# Altium PCB PCB_【征集令】迷你加热台控制板1.6mm_2022-02-26.pcbdoc
Units mm, origin at the board's own origin, x right, y up, seen from the top; angles counter-clockwise.
Board outline 101.48 x 117.21 mm, 2 copper layers (Top Layer, Bottom Layer); 49 components, 65 nets, 198 pads, 91 vias.
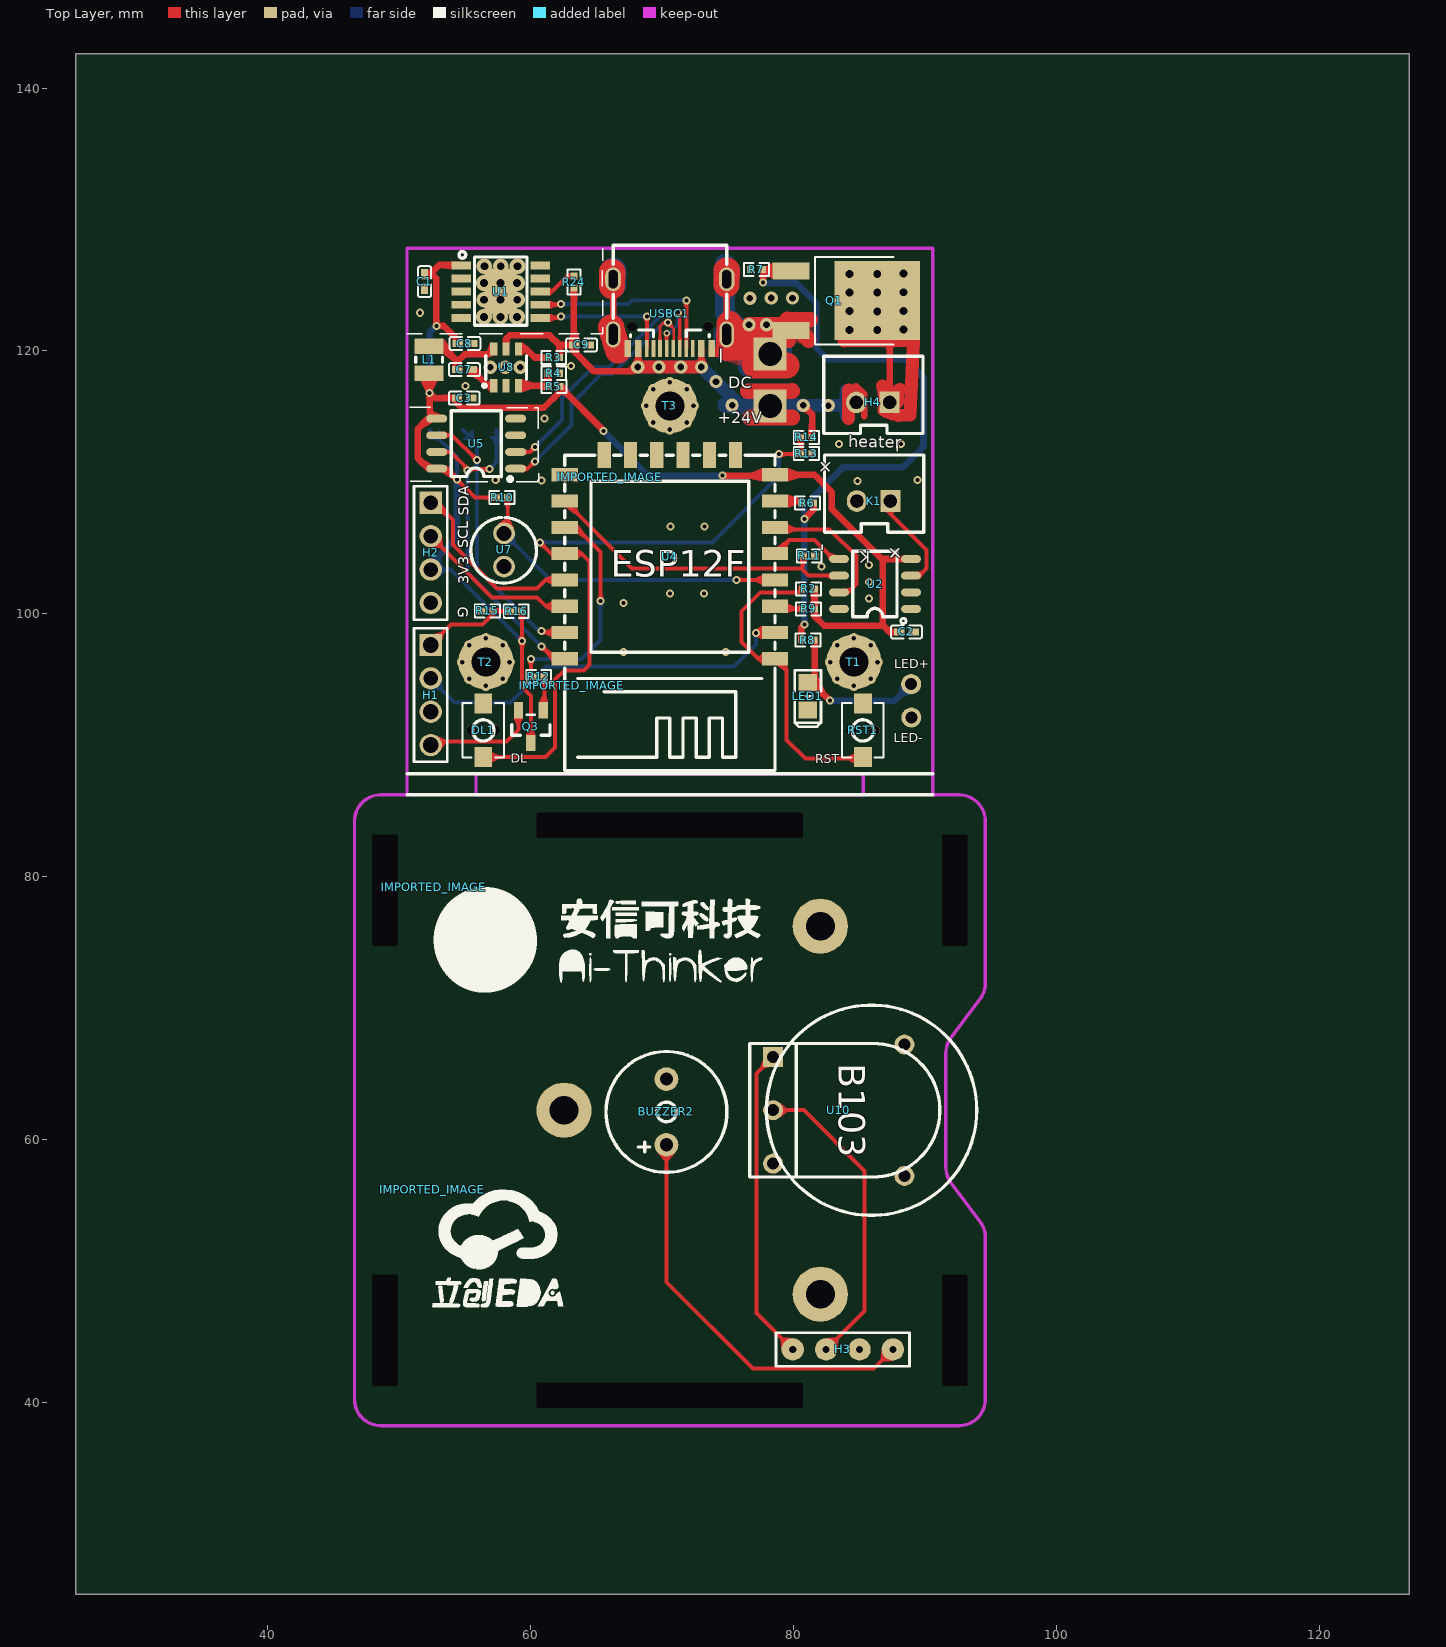
[diagram p0: Top Layer view]
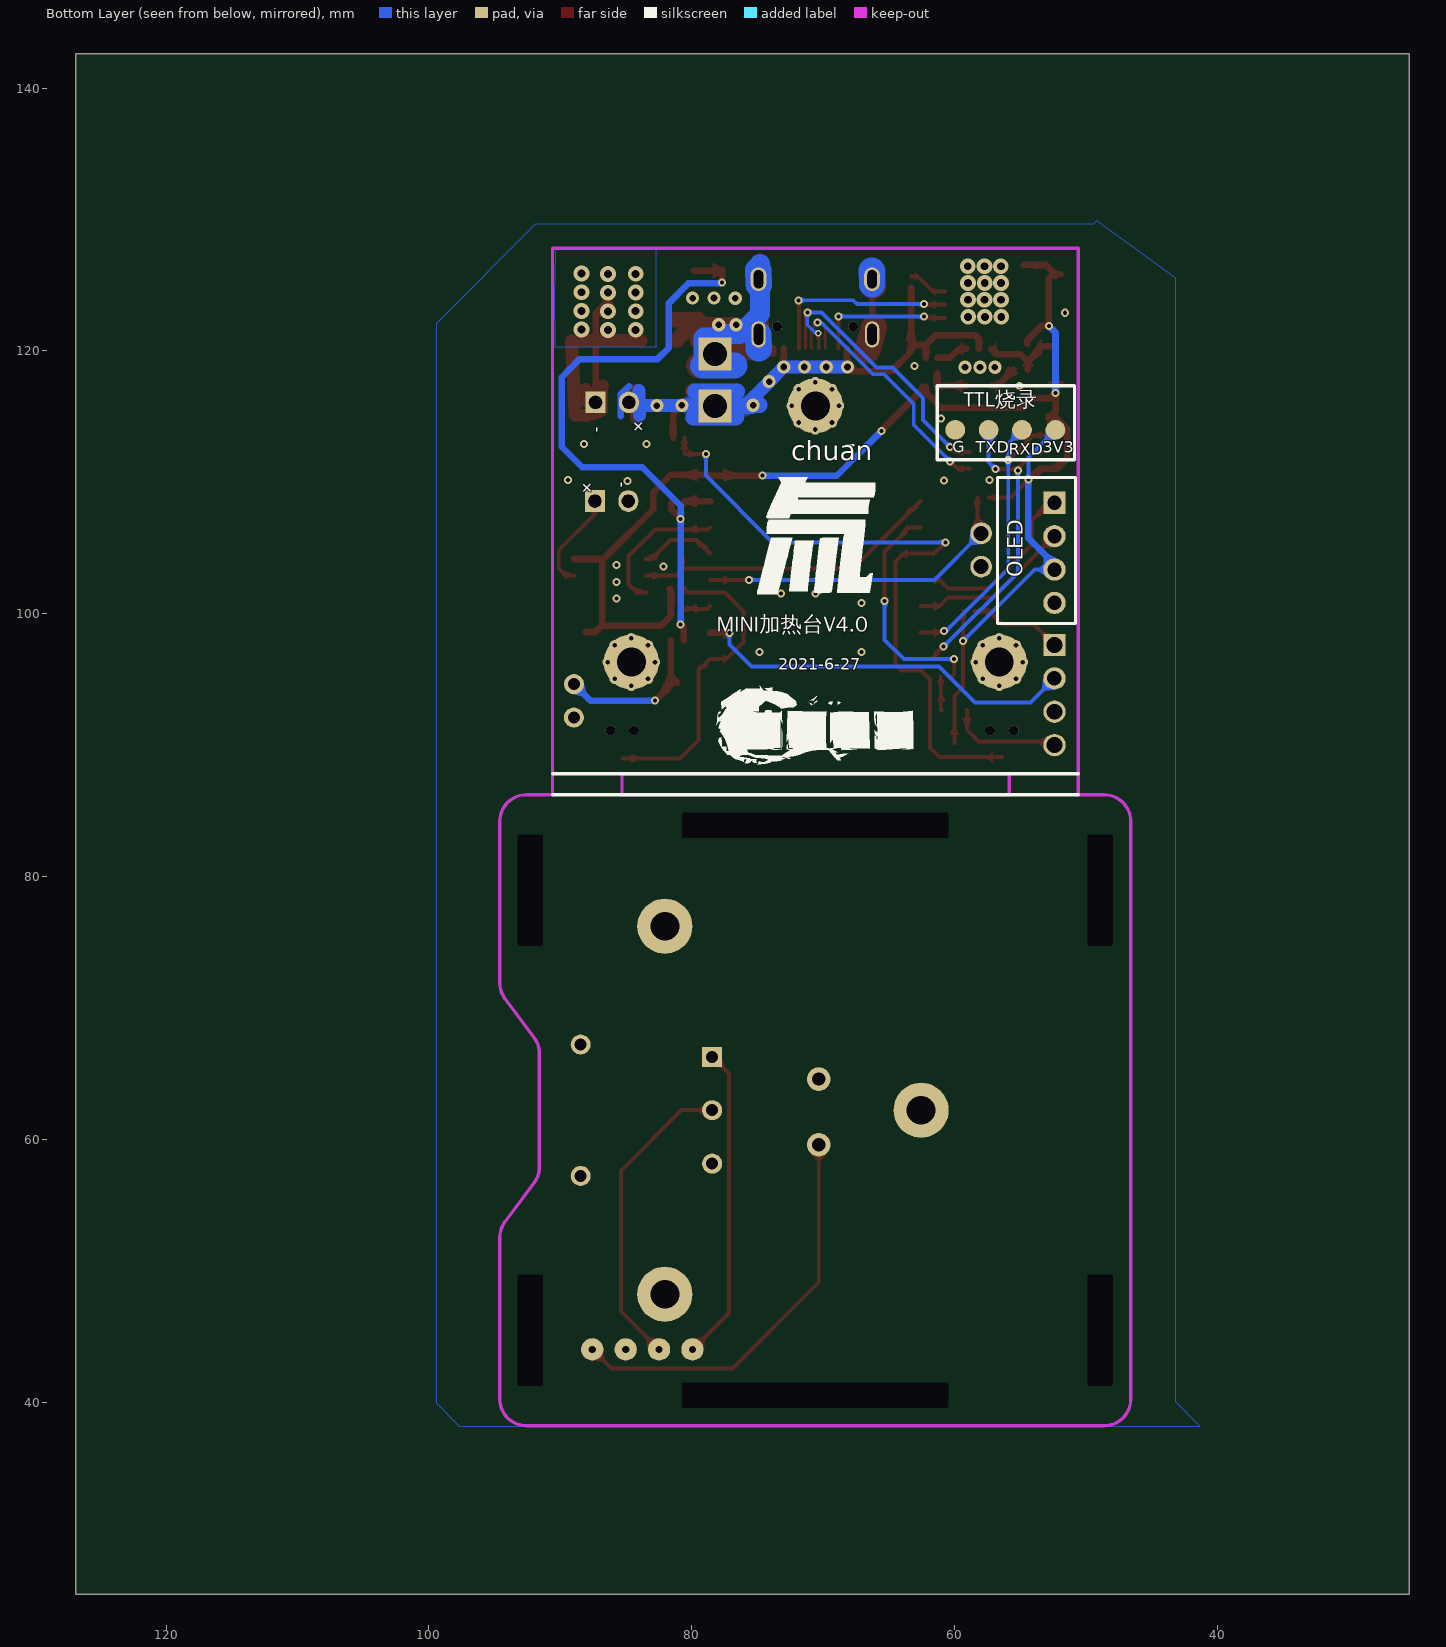
[diagram p1: Bottom Layer view, seen from below]

## Layer stack, top to bottom
Top Layer: signal copper (thickness not stored)
Dielectric: dielectric 0.32, FR-4, Dk 4.8
Bottom Layer: signal copper (thickness not stored)

## Board outline
126.875,25.4 25.4,25.4 25.4,142.613 126.875,142.613
cut-out: 80.604,39.6 60.604,39.6 cw(c60.604,39.727) 60.477,39.727 60.477,41.377 cw(c60.604,41.377) 60.604,41.504 80.604,41.504 cw(c80.604,41.377) 80.731,41.377 80.731,39.727 cw(c80.604,39.727) 80.604,39.6
cut-out: 93.105,74.75 91.455,74.75 cw(c91.455,74.877) 91.328,74.877 91.328,83.077 cw(c91.455,83.077) 91.455,83.204 93.105,83.204 cw(c93.105,83.077) 93.232,83.077 93.232,74.877 cw(c93.105,74.877) 93.105,74.75
cut-out: 49.754,74.75 48.104,74.75 cw(c48.104,74.877) 47.977,74.877 47.977,83.077 cw(c48.104,83.077) 48.104,83.204 49.754,83.204 cw(c49.754,83.077) 49.881,83.077 49.881,74.877 cw(c49.754,74.877) 49.754,74.75
cut-out: 49.754,41.25 48.104,41.25 cw(c48.104,41.377) 47.977,41.377 47.977,49.577 cw(c48.104,49.577) 48.104,49.704 49.754,49.704 cw(c49.754,49.577) 49.881,49.577 49.881,41.377 cw(c49.754,41.377) 49.754,41.25
cut-out: 80.604,82.95 60.604,82.95 cw(c60.604,83.077) 60.477,83.077 60.477,84.727 cw(c60.604,84.727) 60.604,84.854 80.604,84.854 cw(c80.604,84.727) 80.731,84.727 80.731,83.077 cw(c80.604,83.077) 80.604,82.95
cut-out: 93.105,41.25 91.455,41.25 cw(c91.455,41.377) 91.328,41.377 91.328,49.577 cw(c91.455,49.577) 91.455,49.704 93.105,49.704 cw(c93.105,49.577) 93.232,49.577 93.232,41.377 cw(c93.105,41.377) 93.105,41.25

## Components (designator, comment, footprint, x,y, rotation, side; value= is the part's Value field where it differs from the comment)
BUZZER2 "HNB09A03" BUZ-TH_BD9.0-P5.00-D0.6-FD 70.345,62.098 r90 top
C1 "1uf" C0402 51.945,125.278 r90 top
C2 "100nF" C0402 88.605,98.618 r0 top
C3 "100nF" C0402 54.955,116.408 r0 top
C7 "100nF" C0402 54.975,118.578 r180 top
C8 "10uF" C0402 55.015,120.568 r180 top
C9 "4.7uf 25V" C0402 63.885,120.468 r180 top
DL1 "TS-1088-AC02016" SW-SMD_L4.0-W2.9-LS5.0-A 56.405,91.129 r270 top
H1 "Lee_2.54排针-P2.54-4P" LEE_2.54排针-P2.54-4P#1 52.406,93.818 r270 top
H2 "Lee_2.54排针-P2.54-4P" LEE_2.54排针-P2.54-4P#2 52.405,104.638 r270 top
H3 "Lee_2.54排针-P2.54-4P" LEE_2.54排针-P2.54-4P#3 83.764,44.028 r0 top
H4 "K" XH2.54-2 84.786,116.087 r180 top
IMPORTED_IMAGE "IMPORTED_IMAGE" IMPORTED_IMAGE 66.041,110.384 r0 top
IMPORTED_IMAGE "IMPORTED_IMAGE" IMPORTED_IMAGE 63.153,94.533 r0 top
IMPORTED_IMAGE "IMPORTED_IMAGE" IMPORTED_IMAGE 52.539,56.16 r0 top
IMPORTED_IMAGE "IMPORTED_IMAGE" IMPORTED_IMAGE 52.645,79.184 r0 top
K1 "K" XH2.54-2 84.835,108.578 r180 top
L1 "4.7uH" IND-SMD_L2.5-W2.0 52.284,119.328 r90 top
LED1 "19-217/GHC-YR1S2/3T" LED0805_RED 81.105,93.718 r270 top
Q1 "AOD4184A" TO-252-2_L6.6-W6.1-P4.57-LS9.9-TL-CW 83.106,123.827 r0 top
Q3 "SS8550" SOT-23-3_L2.9-W1.3-P1.90-LS2.4-BR 60.025,91.418 r90 top
R2 "10K" R0402 81.165,101.888 r180 top
R3 "100K" R0402 61.765,119.488 r180 top
R4 "5.1K" R0402 61.775,118.308 r180 top
R5 "16K" R0402 61.785,117.288 r0 top
R6 "100R" R0402 81.066,108.429 r0 top
R7 "100K" R0402 77.185,126.188 r0 top
R8 "470" R0402 81.114,97.997 r0 top
R9 "10K" R0402 81.165,100.377 r180 top
R10 "10K" R0402 57.835,108.838 r0 top
R11 "10K" R0402 81.205,104.408 r180 top
R12 "1K" R0402 60.625,95.218 r0 top
R13 "360K" R0402 80.995,112.198 r180 top
R14 "2M" R0402 80.995,113.418 r0 top
R15 "1K" R0402 56.725,100.228 r0 top
R16 "2.2K" R0402 58.915,100.198 r0 top
R24 "10K" R0402 63.305,125.238 r270 top
RST1 "TS-1088-AC02016" SW-SMD_L4.0-W2.9-LS5.0-A 85.295,91.129 r90 top
T1 "M2.6" 螺钉孔M2.6 84.605,96.328 r0 top
T2 "M2.6" 螺钉孔M2.6 56.605,96.328 r0 top
T3 "M2.6" 螺钉孔M2.6 70.605,115.828 r0 top
U1 "CH224K" ESSOP10-EP 57.735,124.518 r0 top
U2 "MAX6675" SOIC-8_L5.0-W4.0-P1.27-LS6.0-BL 86.215,102.268 r90 top
U4 "ESP-12F(ESP8266MOD)" WIFIM-SMD_ESP-12F-ESP8266MOD 70.605,104.328 r90 top
U5 "CH330N" SOP-8_L4.9-W3.9-P1.27-LS6.0-BL 55.865,112.948 r90 top
U7 "SW-520D" SW-520D 57.985,106.128 r90 top
U8 "JW5026" SOT-23-6_L2.9-W1.6-P0.95-LS2.8-BL 58.145,118.758 r0 top
U10 "B103单联" B103单联拨盘电位器 78.454,62.227 r270 top
USBC1 "type-c16P" USB-C-SMD_TYPE-C-USB-17 70.605,122.828 r180 top

## Footprints (in the part's own frame and the unit in brackets; to place one, negate y for a bottom-side part, rotate by r counter-clockwise, add the part's x,y. Pads: shape width x height; smd on the part's side, far side on the other; paste and mask are expansions set on the pad)
B103单联拨盘电位器 [mil]
  rect 60x60 hole 36: 1(-160.01,0)
  round 60 hole 36: 2(-0.01,0) 3(159.99,0) ""(-196.81,393.7) ""(196.89,393.7)
  silkscreen extent -315,-70 315,610
BUZ-TH_BD9.0-P5.00-D0.6-FD [mm]
  round 1.8 hole 1: 1(-2.5,0) 2(2.5,0)
  silkscreen extent -4.6,-4.6 4.6,4.6
C0402 [mm]
  rect 0.79x0.54 smd: 1(-0.545,0) 2(0.545,0)
  silkscreen extent -1.17,-0.5 1.17,0.5
ESSOP10-EP [mm]
  rect 2.5x3.5 smd: 0(0,0)
  rect 1.5x0.6 smd: 1(-3,2) 2(-3,1) 3(-3,0) 4(-3,-1) 5(-3,-2) 6(3,-2) 7(3,-1) 8(3,0) 9(3,1) 10(3,2)
  silkscreen extent -3.17,-2.57 2,3.05
IMPORTED_IMAGE [mm]
IND-SMD_L2.5-W2.0 [mm]
  rect 1.2x2.2 smd: 1(1.028,0) 2(-1.028,0)
  silkscreen extent -0.2,-1.02 0.2,1.02
LED0805_RED [mm]
  rect 1.3x1.4 smd: 1(-1.05,0) 2(1.05,0)
  silkscreen extent -2,-1 2.3,1
LEE_2.54排针-P2.54-4P#1 [mm]
  rect 1.7x1.7 hole 1.2: 1(-3.81,0)
  round 1.7 hole 1.1: 2(-1.27,0)
  round 1.7 hole 1.2: 3(1.27,0) 4(3.81,0)
  silkscreen extent -5.08,-1.27 5.08,1.27
LEE_2.54排针-P2.54-4P#2 [mm]
  rect 1.7x1.7 hole 1.1: 1(-3.81,0)
  round 1.7 hole 1.1: 2(-1.27,0) 3(1.27,0) 4(3.81,0)
  silkscreen extent -5.08,-1.27 5.08,1.27
LEE_2.54排针-P2.54-4P#3 [mm]
  round 1.7 hole 0.55: 1(-3.81,0) 2(-1.27,0) 3(1.27,0) 4(3.81,0)
  silkscreen extent -5.08,-1.27 5.08,1.27
R0402 [mm]
  rect 0.566x0.54 smd: 1(-0.433,0) 2(0.433,0)
  silkscreen extent -0.94,-0.5 0.94,0.5
SOIC-8_L5.0-W4.0-P1.27-LS6.0-BL [mm]
  oval 0.6x1.52 smd: 1(-1.905,-2.74) 2(-0.635,-2.74) 3(0.635,-2.74) 4(1.905,-2.74) 5(1.905,2.74) 6(0.635,2.74) 7(-0.635,2.74) 8(-1.905,2.74)
  silkscreen extent -2.49,-1.67 2.5,1.7
SOP-8_L4.9-W3.9-P1.27-LS6.0-BL [mm]
  oval 0.6x1.6 smd: 1(-1.905,-3) 2(-0.635,-3) 3(0.635,-3) 4(1.905,-3) 5(1.905,3) 6(0.635,3) 7(-0.635,3) 8(-1.905,3)
  silkscreen extent -2.84,-2.74 2.5,1.9
SOT-23-3_L2.9-W1.3-P1.90-LS2.4-BR [mm]
  rect 1.25x0.7 smd: 1(1.25,-0.95) 2(1.25,0.95) 3(-1.25,0)
  silkscreen extent -0.65,-1.46 0.9,1.46
SOT-23-6_L2.9-W1.6-P0.95-LS2.8-BL [mm]
  rect 0.55x1 smd: 1(-0.95,-1.4) 2(0,-1.4) 3(0.95,-1.4) 4(0.95,1.4) 5(0,1.4) 6(-0.95,1.4)
  silkscreen extent -1.78,-1.52 1.55,0.9
SW-520D [mil]
  round 65 hole 45: 1(-100,0) 2(0,0)
  silkscreen extent -149,-97 47,99
SW-SMD_L4.0-W2.9-LS5.0-A [mm]
  rect 1.53x1.36 smd: 1(-2.035,0) 2(2.035,0)
  round 0.75 hole 0.75 unplated: ""(0,0.9) ""(0,-0.9)
  silkscreen extent -2.08,-1.58 2.08,1.58
TO-252-2_L6.6-W6.1-P4.57-LS9.9-TL-CW [mm]
  rect 2.8x1.3 smd: 1(-3.292,2.273) 3(-3.292,-2.273)
  rect 6.5x6 smd: 2(3.292,0)
  silkscreen extent -1.46,-3.35 4.51,3.34
USB-C-SMD_TYPE-C-USB-17 [mm]
  oval 1.2x1.8 hole 0.7 slot 1.4 at 90 deg: 0(-4.32,-2.634) 0(4.32,-2.634)
  oval 1.1x2 hole 0.7 slot 1.6 at 90 deg: 0(-4.32,1.566) 0(4.32,1.566)
  rect 0.5x1.3 smd: A1(-3.2,2.633) A4(-2.4,2.633) A9(2.4,2.633) A12(3.2,2.633)
  rect 0.28x1.3 smd: A5(-1.25,2.633) A6(-0.25,2.633) A7(0.25,2.633) A8(1.25,2.634) B5(1.75,2.633) B6(0.75,2.633) B7(-0.75,2.633) B8(-1.75,2.634)
  round 0.75 hole 0.75 unplated: ""(-2.89,0.956) ""(2.89,0.956)
  silkscreen extent -4.32,-5.22 4.32,1.75
WIFIM-SMD_ESP-12F-ESP8266MOD [mm]
  rect 1x2 smd: 1(-7.751,-8.002) 2(-5.751,-8.002) 3(-3.751,-8.002) 4(-1.751,-8.002) 5(0.249,-8.002) 6(2.249,-8.002) 7(4.249,-8.002) 8(6.249,-8.001) 9(6.249,7.999) 10(4.249,8) 11(2.249,8.002) 12(0.249,8.001) 13(-1.751,8) 14(-3.751,8.001) 15(-5.751,8) 16(-7.751,8.001)
  rect 2x1 smd: 17(7.75,-5) 18(7.749,-3.002) 19(7.749,-1.003) 20(7.749,0.998) 21(7.749,2.997) 22(7.75,4.997)
  silkscreen extent -16.25,-8 7.75,8
XH2.54-2 [mil]
  rect 60x65 hole 39.36: 1(-100.1,0)
  oval 60x65 hole 39.36: 2(0,0)
  silkscreen extent -200,-138 97,93
螺钉孔M2.6 [mm]
  round 0.8 hole 0.35: 1(-1.8,0) 1(-1.273,1.273) 1(-1.273,-1.273) 1(0,-1.8) 1(0,1.8) 1(1.273,1.273) 1(1.273,-1.273) 1(1.8,0)
  round 4.2 hole 2.2: 1(0,0)

## Free pads (board coordinates)
  round 4.2 hole 2.2: 1(62.553,62.228) 1(82.053,76.228) 1(82.054,48.228)
  rect 2.5x2.5 hole 1.8: 1(78.235,115.808) 2(78.235,119.768)
  round 1.524 hole 0.914: 3(88.965,94.648) 4(88.975,92.108)
  round 1.5 smd far side: 5(52.336,113.998) 5(54.876,113.998) 5(57.416,113.998) 5(59.956,113.998)

## Via types
v1: diameter 0.61, hole 0.305, Top Layer to Bottom Layer, tented both sides, 50 vias
v2: diameter 1.2, hole 0.6, Top Layer to Bottom Layer, tented both sides, 24 vias
v3: diameter 1, hole 0.5, Top Layer to Bottom Layer, tented both sides, 16 vias
v4: diameter 0.5, hole 0.254, Top Layer to Bottom Layer, tented both sides, 1 vias

## Nets (pads, with @x,y where several pads share a name; then routed paths per layer and width w, separated by ;. In a path a pad name is that pad's centre, name@x,y a point inside that pad or via, vN(x,y) a via of type N, cw(c..) or ccw(c..) an arc to the next point about the centre after c; other vN are vias at no path point)
3V3: C1.2 C2.1 C3.1 C8.2 H2.3 L1.2 pad.5@52.336,113.998 Q3.3 R2.1 R5.2 R9.1 R10.1 R16.2 U1.1 U2.4 U4.8 U5.5 U5.8 | length 121.8
  Top Layer w0.3: v1@54.395,110.207 55.764,108.837 R10.1 ; R16.2 59.348,97.926 v1(59.355,97.918) 59.356,94.428 60.024,93.757 Q3.3@60.024,90.168
  Top Layer w0.5: L1.2@52.284,118.299 52.284,116.859 v1@52.325,116.818 ; U5.8@52.863,111.042 53.559,111.042 v1@54.395,110.207 ; U5.8@52.866,111.042 52.218,111.042 51.433,111.827 51.433,114.077 52.211,114.852 52.866,114.852 52.325,115.393 v1@52.325,116.818 ; C8.2@54.469,120.567 54.469,120.842 53.404,121.908 v1(52.835,121.908) 52.835,125.528 52.538,125.822 51.944,125.822 52.327,125.822 53.054,126.549 54.705,126.549 U1.1 ; v1@65.563,113.907 65.563,113.94 R5.2 62.218,116.882 61.014,115.678 54.773,115.678 54.41,116.043 54.41,116.407 52.734,116.407 v1@52.325,116.818 ; v1@74.606,110.506 78.606,110.506 U4.8 ; U4.8@78.606,110.575 81.606,110.575 82.937,109.244 82.937,107.956 86.719,104.171 U2.4@88.954,104.171 ; R2.1@81.664,101.888 81.598,101.819 R9.1 81.598,99.843 82.355,99.086 86.854,99.086 87.324,98.617 88.06,98.617 87.357,98.617 86.805,99.168 86.805,104.171
  Bottom Layer w0.3: pad.5@52.335,113.998 54.395,111.938 v1(54.395,110.208) ; H2.3 53.905,103.368 v1(59.355,97.918)
  Bottom Layer w0.5: v1(52.325,116.818) 52.325,121.398 v1(52.835,121.908) ; H2.3@52.394,103.768 54.396,105.767 v1@54.396,110.207 ; v1(65.565,113.908) 68.965,110.508 v1(74.605,110.508)
ADC: H1.2 U4.2 | length 29.7
  Top Layer w0.5: v1(77.145,98.548) 78.578,98.548 U4.2@78.606,98.576
  Bottom Layer w0.3: H1.2 54.226,93.267 58.465,93.267 61.185,95.988 75.475,95.988 77.147,97.656 v1@77.147,98.548
BEEP: R12.1 U4.11 | length 17.5
  Top Layer w0.3: v1@60.034,96.546 60.034,95.375 R12.1@60.191,95.218 ; U4.11 63.455,106.577 65.335,104.697 v1@65.335,100.969
  Bottom Layer w0.3: v1@60.035,96.546 63.865,96.546 65.336,98.017 v1(65.335,100.968)
  other v1: 60.035,96.548
C7_1: C7.1 U8.1 | length 2.2
  Top Layer w0.5: C7.1 56.742,117.357 U8.1@57.197,117.357
CC1: U1.7 USBC1.A5 | length 15
  Top Layer w0.3: U1.7@60.735,123.519 62.284,123.519 v1@62.325,123.557 ; USBC1.A5@71.855,120.194 71.855,123.839 v1@71.875,123.856
  Bottom Layer w0.3: v1(62.325,123.558) 67.435,123.558 67.735,123.858 v1(71.875,123.858)
CC2: U1.6 USBC1.B5 | length 10.6
  Top Layer w0.3: U1.6@60.735,122.518 62.236,122.518 v1@62.335,122.617 ; USBC1.B5@68.855,120.194 v1@68.855,122.627
  Bottom Layer w0.3: v1(62.335,122.617) 63.828,122.617 63.838,122.628 v1(68.855,122.628)
CS: R11.2 U2.6 U4.10 | length 24.1
  Top Layer w0.3: U4.10@62.604,108.576 67.722,103.46 80.605,103.46 ; R11.2@80.704,104.408 80.704,103.361 81.164,102.901 U2.6@83.475,102.901
DM: U5.2 USBC1.A7 USBC1.B7 | length 23.7
  Top Layer w0.254: USBC1.A7@70.354,120.194 70.354,121.337 v4@70.374,121.357 ; v1@71.205,122.927 71.355,122.777 USBC1.B7@71.355,120.194
  Top Layer w0.3: U5.2@58.865,112.312 59.96,112.312 v1@60.354,112.708
  Bottom Layer w0.254: v4(70.375,121.358) 70.576,121.358 71.206,121.987 v1@71.206,122.927
  Bottom Layer w0.3: v1(60.355,112.708) 62.404,114.758 62.404,116.407 64.736,118.738 65.955,118.738 70.144,122.927 v1@71.206,122.927
  other v1: 71.205,122.928
DP: U5.1 USBC1.A6 USBC1.B6 | length 21.6
  Top Layer w0.2: USBC1.B6@69.853,120.194 69.853,121.878 70.123,122.147 70.445,122.147 70.905,121.687 USBC1.A6@70.905,120.194
  Top Layer w0.3: U5.1@58.865,111.042 59.79,111.042 v1@60.354,111.609
  Bottom Layer w0.3: v1(60.355,111.608) 63.116,114.367 63.116,115.967 65.376,118.228 66.214,118.228 70.134,122.147 v1@70.446,122.147
  other v1: 70.445,122.148
GND: BUZZER2.2 C1.1 C2.2 C3.2 C8.1 C9.1 DL1.1 H1.3 H2.4 H3.3 K1.2 LED1.2 pad.1@62.553,62.228 pad.1@82.053,76.228 pad.1@82.054,48.228 pad.2 pad.4 pad.5@59.956,113.998 Q1.3 R4.1 R7.1 R11.1 R13.1 R15.1 RST1.2 T1.1 T2.1 T3.1 U1.0 U2.1 U2.2 U4.9 U5.3 U7.1 U8.2 U10.3 USBC1.0 USBC1.A1 USBC1.A12 | length 63.8
  Top Layer w0.5: USBC1.0@66.285,125.462 66.285,121.261 67.352,120.194 USBC1.A12@67.405,120.194 ; USBC1.A1@73.803,120.194 73.803,119.808 74.923,119.808 74.923,121.261 USBC1.0@74.923,125.462
  Top Layer w1: USBC1.0@74.923,121.261 74.951,121.289 77.895,121.289 79.645,120.707 Q1.3@79.813,121.555 ; v3(76.625,121.997) 77.335,121.288 77.895,121.288
  Top Layer w1.2: v3(76.625,121.997) 80.006,121.997 81.164,120.836 ; pad.2@77.745,120.227 79.074,121.555 Q1.3@79.813,121.555 ; 79.545,122.388 81.285,122.378
  Top Layer w1.5: USBC1.0@74.926,121.261 76.402,121.261 pad.2@78.294,119.368
  Top Layer w1.6: USBC1.0@74.926,121.261 74.926,120.427 74.916,120.029 77.585,120.067 77.745,120.227 78.294,119.678 pad.2@78.294,119.368
  Top Layer w2: USBC1.0@66.135,121.786 66.656,120.057 ; USBC1.0@66.195,124.945 USBC1.0@66.215,126.01 ; USBC1.0@74.916,125.052 USBC1.0@74.935,126.117 ; USBC1.0@75.125,120.975 USBC1.0@75.145,122.04 ; pad.2@77.075,118.898 pad.2@79.455,118.898
  Bottom Layer w1: 77.895,121.289 79.152,121.289 79.384,121.057 79.384,119.368 pad.2@78.294,119.368
  Bottom Layer w1.5: 74.805,126.628 74.805,122.828 76.345,121.288 77.895,121.288
  Bottom Layer w2: USBC1.0@66.285,125.065 USBC1.0@66.305,126.13 ; 74.906,120.196 USBC1.0@74.926,121.261 ; USBC1.0@74.916,125.052 USBC1.0@74.935,126.118 ; 76.755,118.888 pad.2@79.135,118.888
  other v1: 67.079,97.077 74.856,97.077 67.075,100.808 85.745,101.148 70.605,101.528 73.205,101.528 85.745,102.428 82.155,103.588 85.745,103.707 70.645,106.638 73.245,106.638 84.895,110.118 60.825,110.128 57.355,110.188 89.435,110.178 83.465,112.938 88.205,112.938 61.055,114.868 55.055,117.347 63.065,118.868 51.595,122.908
  other v2: 56.455,122.598 57.705,122.598 58.975,122.598 56.475,123.898 57.725,123.898 58.995,123.898 56.465,125.168 57.715,125.168 58.985,125.168 56.485,126.448 57.735,126.448 59.005,126.448
  other v3: 56.935,118.757 58.075,118.757 59.215,118.757 77.955,121.997 76.695,124.008 78.315,124.027 79.935,124.018
GPIO0: DL1.2 R13.2 R14.1 U4.12 | length 51.1
  Top Layer w0.3: DL1.2@56.404,89.092 61.149,89.092 61.875,89.818 61.875,94.997 62.574,95.698 64.065,95.698 64.494,96.127 64.494,103.978 63.895,104.578 U4.12 61.576,104.578 v1@60.715,105.436 ; v1@78.924,112.157 80.521,112.157 80.562,112.198 R14.1@80.562,113.417
  Bottom Layer w0.3: v1@60.715,105.436 73.855,105.436 78.925,110.509 v1(78.925,112.158)
  other v1: 60.715,105.438
GPIO13: R6.1 U4.7 | length 2.1
  Top Layer w0.5: U4.7@78.606,108.576 80.565,108.576 R6.1@80.565,108.429
H1_1: H1.1 R15.2 R16.1 | length 7.3
  Top Layer w0.3: H1.1@52.404,97.628 53.956,99.178 56.364,99.178 57.159,99.97 57.159,100.227 57.186,100.199 R16.1@58.482,100.199
H1_4: H1.4 Q3.2 | length 8.6
  Top Layer w0.3: H1.4@52.404,90.008 52.686,90.288 58.185,90.288 59.074,91.177 Q3.2@59.074,92.668
H3_1: H3.1 U10.1 | length 23.9
  Top Layer w0.3: U10.1@78.454,66.292 77.184,65.022 77.184,46.795 H3.1@79.952,44.027
H3_2: H3.2 U10.2 | length 23.7
  Top Layer w0.3: U10.2@78.454,62.228 80.796,62.228 85.406,57.618 85.406,46.938 H3.2@82.495,44.027
H3_4: BUZZER2.1 H3.4 | length 31
  Top Layer w0.3: BUZZER2.1@70.344,59.597 70.344,49.137 76.915,42.569 86.115,42.569 H3.4@87.573,44.027
IO16: R10.2 U4.4 U7.2 | length 24.9
  Top Layer w0.3: U7.2@57.984,106.14 57.984,106.366 58.269,106.651 R10.2 ; v1@75.665,102.587 75.675,102.576 U4.4@78.606,102.576
  Bottom Layer w0.3: U7.2@57.985,106.127 61.526,102.587 v1@75.666,102.587
  other v1: 75.665,102.588
L1_1: C7.2 L1.1 U8.6 | length 7
  Top Layer w0.5: L1.1 53.326,120.356 54.431,119.251 C7.2 54.431,119.173 55.005,119.747 56.785,119.747 U8.6
LED1_1: LED1.1 pad.3 R8.2 | length 12.4
  Top Layer w0.5: R8.2@81.614,97.997 81.614,95.276 LED1.1 81.423,94.768 v1@82.805,93.387
  Bottom Layer w0.5: v1(82.805,93.388) 87.705,93.388 pad.3
MISO: U2.7 U4.6 | length 10.8
  Top Layer w0.3: U4.6@78.606,106.577 78.756,106.427 82.764,106.427 84.804,104.387 84.804,102.277 84.159,101.631 U2.7@83.475,101.631
Q1_1: Q1.1 R6.2 R7.2 R8.1 | length 48.4
  Top Layer w0.5: v1@77.705,125.218 77.705,126.168 77.684,126.188 77.771,126.102 Q1.1@79.853,126.102 ; R8.1@80.615,97.997 80.615,98.937 v1@80.854,99.178 ; v1@80.844,107.227 81.565,107.948 R6.2@81.565,108.429
  Bottom Layer w0.5: v1(77.705,125.217) 77.784,125.137 80.266,125.137 81.747,123.658 81.747,120.237 82.605,119.378 88.536,119.378 89.905,118.007 89.905,112.719 88.335,111.146 87.985,111.146 83.773,111.146 80.845,108.218 v1@80.845,107.227 ; v1(80.845,107.228) 80.845,99.188 v1(80.855,99.178)
Q1_2: H4.1 Q1.2 | length 26
  Top Layer w0.5: Q1.2@86.394,123.808 87.326,122.876 H4.1@87.326,116.087 ; 86.905,115.187 87.505,114.969
  Top Layer w0.8: 86.785,117.321 86.785,115.441 H4.1@87.905,116.117
  Top Layer w1: 83.875,120.778 88.445,120.808 ; 86.785,117.321 87.326,116.087 87.905,116.117 87.905,116.866 88.093,117.057 ; 87.965,115.098 88.015,115.098 88.875,115.128 89.145,120.738
  other v2: 86.385,121.597 84.275,121.607 88.395,121.627 86.385,123.017 84.275,123.027 88.395,123.047 84.275,124.447 86.385,124.437 88.395,124.467 84.275,125.867 86.385,125.857 88.395,125.887
R3_2: R3.2 U8.4 | length 2.5
  Top Layer w0.5: U8.4 59.663,120.158 60.334,119.488 R3.2@61.332,119.488
R4_2: R4.2 R5.1 U8.3 | length 3.3
  Top Layer w0.5: U8.3@59.097,117.357 60.948,117.357 60.948,117.288 61.352,117.288 61.342,117.298 R4.2@61.342,118.307
R12_2: Q3.1 R12.2 | length 2.6
  Top Layer w0.3: Q3.1@60.974,92.668 61.057,92.668 R12.2@61.057,95.218
R24_1: R24.1 U1.8 | length 3
  Top Layer w0.3: U1.8@60.735,124.517 61.634,124.517 62.787,125.67 R24.1@63.305,125.67
RXD: pad.5@57.416,113.998 U4.16 U5.7 | length 25.8
  Top Layer w0.3: U5.7@52.863,112.312 53.92,112.312 55.195,111.037 v1(55.195,110.917) 55.285,111.008 v1(56.885,111.008) ; v1@60.844,97.507 61.776,96.577 U4.16
  Bottom Layer w0.3: v1@55.196,110.918 55.196,103.155 v1@60.845,97.507 ; v1(56.885,111.008) 57.415,111.538 pad.5@57.415,113.997
  other v1: 60.845,97.508
S$7: 
S$50: 
S$52: 
S$438: 
S$3262: 
S$20504: 
S$20506: 
S$20508: 
S$20510: 
S$20512: 
S$20514: 
S$20516: 
S$20520: 
S$20522: 
S$24043: 
S$26919: 
S$26978: 
S$26980: 
S$26982: 
S$29675: 
S$29677: 
S$29679: 
S$29681: 
S$29683: 
S$35757: 
S$35779: 
S$35781: 
S$36377: 
S$36379: 
SCL: H2.2 U4.14 | length 12.4
  Top Layer w0.3: H2.2@52.404,105.906 57.062,101.248 60.494,101.248 61.164,100.577 U4.14
SCLK: U2.5 U4.5 | length 5.9
  Top Layer w0.3: U4.5@78.606,104.578 79.655,105.627 81.616,105.627 83.069,104.171 U2.5@83.475,104.171
SDA: H2.1 U4.13 | length 14.4
  Top Layer w0.3: H2.1@52.393,108.848 54.105,107.136 54.105,105.276 57.453,101.929 60.494,101.929 61.144,102.576 U4.13@62.604,102.576
TXD: pad.5@54.876,113.998 U4.15 U5.6 | length 23.6
  Top Layer w0.3: U5.6@52.863,113.582 54.029,113.582 v1@55.924,111.687 ; v1@60.824,98.688 60.936,98.576 U4.15@62.604,98.576
  Bottom Layer w0.3: pad.5@54.875,113.997 55.925,112.948 55.925,111.688 55.925,103.408 60.645,98.688 v1(60.825,98.688)
  other v1: 55.925,111.688
U2_3: K1.1 U2.3 | length 7.7
  Top Layer w0.3: K1.1@87.377,108.578 87.377,107.606 90.125,104.857 90.125,103.437 89.589,102.901 U2.3@88.954,102.901
U4_1: R2.2 RST1.1 U4.1 | length 23.6
  Top Layer w0.3: R2.2@80.664,101.888 80.405,101.626 77.484,101.626 76.054,100.196 76.054,97.87 77.346,96.577 78.606,96.577 79.495,95.688 79.495,90.407 80.91,88.992 RST1.1@85.294,88.992
U4_3: R9.2 U4.3 | length 2.2
  Top Layer w0.3: U4.3@78.606,100.577 78.807,100.377 R9.2
VBUS: C9.2 H4.2 pad.1@78.235,115.808 R3.1 R14.2 R24.2 U8.5 USBC1.A4 USBC1.A9 | length 76.9
  Top Layer w0.5: U8.5 58.147,120.918 58.416,121.187 61.454,121.187 62.198,120.445 R3.1 ; 62.198,120.394 62.198,120.468 C9.2@63.338,120.468 ; R24.2@63.305,124.804 63.305,120.468 C9.2@63.338,120.468 ; USBC1.A9@68.205,120.194 68.205,118.827 68.154,118.776 67.824,118.446 64.837,118.446 63.338,119.942 C9.2@63.338,120.468 ; v3@73.006,118.776 USBC1.A4@73.006,120.194 ; v3(80.755,115.858) 81.428,115.185 R14.2@81.428,113.417 ; 84.745,117.329 85.403,116.737 85.393,115.027
  Top Layer w1: v3(68.155,118.778) v3(69.771,118.778) v3(71.435,118.778) v3(73.005,118.778) ; 84.193,114.855 84.218,117.02
  Top Layer w1.2: 76.545,116.928 79.906,116.948 ; 76.675,114.928 79.904,114.935
  Bottom Layer w0.5: 84.745,117.329 85.403,116.737 ; 85.396,115.038 85.396,116.747
  Bottom Layer w1: v3(68.155,118.778) v3(73.005,118.778) v3(74.117,117.666) ; v3(74.117,117.666) 75.224,116.559 75.975,115.807 78.235,115.807 78.215,115.828 76.605,115.828 ; v3(75.335,115.868) 80.745,115.868 v3(80.755,115.858) 82.635,115.858 v3(82.655,115.837) 84.535,115.838 84.784,116.087 84.606,115.909 H4.2@84.606,115.828 ; 83.994,115.099 84.015,116.968
  Bottom Layer w1.2: 74.824,115.889 75.314,115.889 75.335,115.868 75.396,115.807 pad.1@78.235,115.807 ; 76.545,116.928 79.774,116.935 ; 76.645,114.928 79.874,114.935
pads on no net: DL1. RST1. U1.2 U1.3 U1.4 U1.5 U1.9 U1.10 U2.8 U4.17 U4.18 U4.19 U4.20 U4.21 U4.22 U5.4 U10. USBC1. USBC1.A8 USBC1.B8

## Polygon pours and split planes (outlines as drawn)
GND on Bottom Layer (solid): 49.205,129.898 49.465,129.638 91.915,129.638 99.465,122.088 99.465,39.968 97.685,38.188 41.335,38.188 43.185,40.038 43.185,125.538
Q1_2 on Bottom Layer (solid): 82.695,127.718 90.355,127.698 90.375,127.558 90.465,124.078 90.435,120.528 90.425,120.318 82.715,120.318 82.695,120.298
VBUS on Bottom Layer (solid): 71.255,119.278 71.305,119.228 74.005,119.228 75.655,117.578 84.855,117.578 85.555,116.878 85.605,116.878 85.655,116.828 85.655,114.928 85.055,114.328 74.505,114.328 73.955,114.878 73.955,116.478 72.105,118.328 71.005,118.328 70.905,118.428 70.905,119.128
GND on Top Layer (solid): 49.36,129.913 49.62,129.653 92.07,129.653 99.62,122.103 99.62,39.983 97.84,38.203 41.49,38.203 43.34,40.053 43.34,125.553
VBUS on Top Layer (solid): 71.255,119.278 71.305,119.228 74.005,119.228 75.655,117.578 84.855,117.578 85.555,116.878 85.605,116.878 85.655,116.828 85.655,114.928 85.055,114.328 74.505,114.328 73.955,114.878 73.955,116.478 72.105,118.328 71.005,118.328 70.905,118.428 70.905,119.128
Q1_2 on Top Layer (solid): 87.855,114.588 86.395,115.168 86.385,117.038 85.555,118.098 84.875,118.888 84.315,119.538 84.045,119.858 83.715,120.218 83.155,120.828 84.738,120.828 89.595,120.798 89.575,114.628 87.855,114.588

## Keep-outs
Keep-Out Layer:
  lines w0.254: 46.604,40.227 ccw(c48.604,40.227) 48.605,38.227 ; 91.605,57.894 ccw(c93.605,57.894) 92.005,56.694 ; 91.605,66.56 cw(c93.605,66.561) 92.005,67.761 ; 92.605,38.227 ccw(c92.605,40.227) 94.605,40.227 ; 92.605,86.227 cw(c92.605,84.227) 94.605,84.227 ; 94.205,53.761 cw(c92.605,52.561) 94.605,52.561 ; 94.205,70.694 ccw(c92.605,71.894) 94.605,71.894
  lines w0.254 net S$26980: 46.605,84.227 cw(c48.605,84.227) 48.605,86.227

## Other copper
Top Layer:
  region net DP: 59.366,111.343 59.365,110.743 59.79,110.892 59.79,111.192
  region net DM: 59.366,112.613 59.365,112.013 59.815,112.162 59.816,112.462
  region net 3V3: 52.214,110.784 52.54,111.343 51.888,111.726 51.575,111.332
  region net 3V3: 53.416,111.338 53.314,110.743 53.933,110.315 54.194,110.761
  region net RXD: 53.366,112.613 53.365,112.013 53.815,112.162 53.816,112.462
  region net TXD: 53.366,113.883 53.365,113.283 53.815,113.432 53.816,113.732
  region net 3V3: 52.083,114.75 53.19,115.153 52.678,115.393 52.148,115.216
  region net 3V3: 52.521,114.553 52.227,115.119 51.569,114.566 51.875,114.164
  region net U2_3: 89.561,102.64 89.27,103.165 89.733,103.257 89.884,102.985
  region net 3V3: 88.496,103.873 88.495,104.473 87.745,104.422 87.746,103.922
  region net MISO: 84.059,101.359 83.812,101.906 84.279,101.964 84.412,101.672
  region net CS: 83.016,102.603 83.015,103.203 82.565,103.052 82.566,102.752
  region net SCLK: 82.747,104.038 83.359,104.473 82.795,104.659 82.529,104.5
  region net H3_1: 78.219,65.529 77.692,66.064 77.533,65.584 77.744,65.37
  region net R12_2: 60.682,93.292 61.325,93.292 61.207,93.742 60.907,93.742
  region net H1_4: 59.425,92.042 58.725,92.042 58.924,91.592 59.224,91.592
  region net 3V3: 59.675,90.793 60.375,90.793 60.174,91.243 59.874,91.243
  region net 3V3: 87.665,98.888 87.665,98.348 87.357,98.367 87.357,98.867
  region net 3V3: 87.665,98.888 87.665,98.348 87.324,98.367 87.324,98.867
  region net 3V3: 54.015,116.138 54.805,116.138 54.66,116.043 54.16,116.043
  region net 3V3: 54.015,116.678 54.015,116.138 53.265,116.157 53.265,116.657
  region net R12_2: 61.341,94.948 60.775,94.948 60.907,94.498 61.207,94.498
  region net GPIO0: 80.28,111.928 80.28,112.468 79.83,112.307 79.83,112.007
  region net GPIO0: 80.28,112.468 80.845,112.468 80.712,112.918 80.412,112.918
  region net GPIO0: 80.28,113.148 80.845,113.148 80.712,112.698 80.412,112.698
  region net VBUS: 81.145,113.688 81.711,113.688 81.678,114.438 81.178,114.438
  region net H1_1: 57.441,99.958 56.875,99.958 56.482,99.508 56.907,99.508
  region net H1_1: 57.441,100.498 57.441,99.958 57.891,100.049 57.891,100.349
  region net H1_1: 58.2,100.468 58.2,99.928 57.75,100.049 57.75,100.349
  region net 3V3: 59.631,99.928 59.065,99.928 59.198,99.478 59.498,99.478
  region net 3V3: 81.315,101.618 81.88,101.618 81.848,100.868 81.348,100.868
  region net U4_1: 80.832,101.618 80.449,102.158 80.317,101.751 80.511,101.521
  region net 3V3: 81.88,100.647 81.315,100.647 81.348,101.397 81.848,101.397
  region net 3V3: 81.315,100.107 81.88,100.107 81.848,99.843 81.348,99.843
  region net U4_3: 80.449,100.107 80.449,100.647 79.999,100.527 79.999,100.227
  region net 3V3: 57.12,109.108 57.12,108.568 56.67,108.687 56.67,108.987
  region net IO16: 58.551,108.568 57.985,108.568 58.119,108.118 58.419,108.118
  region net CS: 81.055,104.138 80.49,104.138 80.554,103.688 80.854,103.688
  region net 3V3: 52.215,126.218 52.215,125.428 52.538,125.572 52.538,126.072
  region net 3V3: 52.215,126.218 52.215,125.428 52.327,125.572 52.327,126.072
  region net C7_1: 55.915,118.848 55.125,118.308 55.85,117.895 56.27,118.182
  region net L1_1: 54.035,118.848 54.825,118.848 54.681,119.173 54.181,119.173
  region net L1_1: 54.035,118.848 54.825,118.848 54.681,119.251 54.181,119.251
  region net 3V3: 54.075,120.838 54.865,120.838 54.719,120.842 54.219,120.842
  region net VBUS: 62.945,120.198 62.945,120.738 62.198,120.718 62.198,120.218
  region net VBUS: 63.735,120.198 62.945,120.198 63.088,119.942 63.588,119.942
  region net VBUS: 62.945,120.738 63.735,120.738 63.555,121.488 63.055,121.488
  region net R24_1: 63.035,125.953 63.035,125.388 62.787,125.52 62.787,125.82
  region net VBUS: 63.575,124.522 63.035,124.522 63.055,123.772 63.555,123.772
  region net VBUS: 62.481,119.758 61.915,119.758 61.948,120.445 62.448,120.445
  region net R3_2: 61.05,119.218 61.05,119.758 60.334,119.738 60.334,119.238
  region net R4_2: 61.625,118.038 61.06,118.038 61.092,117.298 61.592,117.298
  region net R4_2: 61.07,117.558 61.07,117.018 60.948,117.038 60.948,117.538
  region net R4_2: 61.635,117.558 61.07,117.558 61.092,118.307 61.592,118.307
  region net 3V3: 62.501,117.018 61.935,117.018 61.968,116.882 62.468,116.882
  region net 3V3: 62.501,117.558 61.935,117.018 62.568,116.584 62.93,116.93
  region net SDA: 53.255,108.361 53.255,107.611 53.705,107.324 53.705,107.748
  region net LED1_1: 81.805,95.356 81.637,94.118 82.313,93.525 82.398,94.148
  region net U2_3: 87.752,107.752 87.002,107.752 87.227,107.606 87.527,107.606
  region net CC2: 61.485,122.818 61.485,122.218 61.935,122.368 61.935,122.668
  region net CC1: 61.485,123.818 61.485,123.218 61.935,123.369 61.935,123.669
  region net R24_1: 61.485,124.818 61.485,124.218 61.634,124.367 61.634,124.667
  region net 3V3: 53.985,126.218 53.985,126.818 53.235,126.799 53.235,126.299
  region net DM: 71.215,120.844 71.495,120.844 71.482,121.225 71.228,121.225
  region net DM: 70.215,120.844 70.495,120.844 70.481,121.225 70.227,121.225
  region net DP: 69.715,120.844 69.995,120.844 69.953,121.144 69.753,121.144
  region net ADC: 77.607,98.077 77.607,99.077 77.146,98.798 77.146,98.298
  region net U4_3: 79.607,100.752 79.607,100.077 80.057,100.227 80.057,100.527
  region net IO16: 77.607,102.201 77.607,102.951 77.157,102.726 77.157,102.426
  region net SCLK: 78.73,105.077 79.48,105.077 79.767,105.527 79.343,105.527
  region net MISO: 79.607,106.802 79.607,106.077 80.057,106.277 80.057,106.577
  region net GPIO13: 79.607,109.077 79.607,108.077 80.357,108.326 80.357,108.826
  region net 3V3: 79.606,111.077 79.606,110.077 80.356,110.325 80.356,110.825
  region net 3V3: 77.606,110.077 77.606,111.077 76.856,110.756 76.856,110.256
  region net CS: 63.478,108.077 62.728,108.077 63.342,107.627 63.766,107.627
  region net BEEP: 63.604,106.803 63.604,106.077 64.054,105.766 64.054,106.19
  region net GPIO0: 63.605,104.953 63.605,104.203 63.895,104.428 63.895,104.728
  region net GPIO0: 61.605,104.203 61.605,104.953 61.576,104.728 61.576,104.428
  region net SDA: 61.605,102.201 61.605,102.951 61.155,102.726 61.155,102.426
  region net SCL: 61.605,100.202 61.605,100.952 61.164,100.727 61.164,100.427
  region net TXD: 61.605,98.201 61.605,98.951 61.155,98.726 61.155,98.426
  region net RXD: 61.605,96.373 61.605,97.077 61.155,97.409 61.155,96.985
  region net U4_1: 79.481,96.077 78.731,96.077 79.283,95.688 79.601,95.794
  region net U4_1: 77.607,96.202 77.607,96.952 77.346,96.727 77.346,96.427
  region net R3_2: 59.37,120.658 59.37,119.658 59.663,119.908 59.663,120.408
  region net VBUS: 57.87,120.658 58.42,120.658 58.397,120.918 57.897,120.918
  region net L1_1: 57.193,119.658 56.92,120.658 56.709,120.025 56.962,119.57
  region net C7_1: 56.92,116.858 56.92,117.857 56.742,117.607 56.742,117.107
  region net R4_2: 59.37,117.857 59.37,116.858 60.12,117.107 60.12,117.607
  region net U4_1: 84.615,88.617 84.615,89.367 84.165,89.142 84.165,88.842
  region net Q1_1: 78.414,125.477 78.414,126.727 77.771,126.352 77.771,125.852
  region net 3V3: 52.909,117.7 51.659,117.7 52.034,116.95 52.534,116.95
  region net L1_1: 53.384,120.923 53.384,119.756 54.134,119.194 54.134,119.901
  region net H1_1: 52.723,98.478 53.256,97.951 53.415,98.427 53.202,98.637
  region net GPIO0: 57.085,88.717 57.085,89.467 57.535,89.242 57.535,88.942
  region net BEEP: 60.263,96.345 59.806,96.347 59.884,96.133 60.184,96.132
  region net BEEP: 65.564,101.169 65.106,101.169 65.185,101.382 65.485,101.383
  region net 3V3: 54.699,110.226 54.376,109.903 54.582,109.808 54.794,110.019
  region net 3V3: 54.414,110.512 54.091,110.188 53.925,110.323 54.278,110.678
  region net Q1_1: 77.934,125.42 77.476,125.419 77.455,125.632 77.955,125.633
  region net Q1_1: 81.15,107.209 80.826,107.532 80.962,107.698 81.316,107.345
  region net Q1_1: 80.875,98.873 80.551,99.196 80.438,99.113 80.793,98.76
  region net ADC: 77.347,98.319 77.347,98.776 77.56,98.798 77.56,98.298
  region net IO16: 75.873,102.811 75.861,102.354 76.076,102.426 76.084,102.726
  region net DM: 71.064,122.657 71.491,122.822 71.482,122.589 71.228,122.491
  region net DM: 70.552,121.181 70.178,121.204 70.227,121.026 70.481,121.01
  region net VBUS: 73.38,119.108 72.63,119.108 72.756,119.458 73.256,119.458
  region net VBUS: 68.049,118.289 67.684,118.944 67.421,118.696 67.7,118.196
  region net VBUS: 67.805,119.135 68.553,119.08 68.455,119.438 67.955,119.475
  region net VBUS: 68.486,118.403 68.486,119.153 68.836,119.278 68.836,118.278
  region net RXD: 61.15,97.526 60.825,97.203 61.032,97.108 61.244,97.319
  region net RXD: 54.894,110.961 55.276,111.211 55.096,111.348 54.84,111.18
  region net RXD: 55.442,110.738 55.343,111.184 55.567,111.158 55.634,110.858
  region net TXD: 61.081,98.854 60.958,98.413 61.183,98.426 61.267,98.726
  region net TXD: 55.944,111.992 55.621,111.668 55.525,111.874 55.737,112.087
  region net CC1: 62.146,123.311 62.103,123.766 61.898,123.669 61.926,123.369
  region net CC1: 72.094,123.645 71.637,123.667 71.705,123.45 72.005,123.436
  region net CC2: 62.194,122.347 62.085,122.791 61.895,122.668 61.969,122.368
  region net CC2: 68.627,122.426 69.084,122.426 69.005,122.213 68.705,122.213
  region net DP: 70.244,121.919 70.243,122.376 70.123,122.247 70.123,122.047
  region net DP: 70.75,122.166 70.426,121.843 70.668,121.783 70.809,121.925
  region net DP: 60.374,111.303 60.051,111.627 59.956,111.421 60.167,111.208
  region net DM: 60.374,112.403 60.051,112.727 59.956,112.521 60.168,112.308
  region net 3V3: 74.808,110.736 74.806,110.278 75.02,110.256 75.021,110.756
  region net 3V3: 65.6,114.21 65.26,113.905 65.102,114.049 65.474,114.384
  region net VBUS: 70.102,118.403 70.102,119.153 70.452,119.278 70.452,118.278
  region net VBUS: 69.44,118.402 69.44,119.152 69.09,119.278 69.09,118.278
  region net VBUS: 71.104,118.402 71.104,119.152 70.754,119.278 70.754,118.278
  region net Q1_2: 86.839,123.409 85.939,123.419 86.036,123.812 86.752,123.804
  region net Q1_2: 86.791,123.459 86.772,122.559 87.194,122.654 87.209,123.347
  region net LED1_1: 82.824,93.692 82.501,93.368 82.335,93.503 82.687,93.858
  region net 3V3: 53.037,121.679 53.036,122.137 53.25,122.158 53.251,121.658
  region net 3V3: 53.064,122.109 52.607,122.109 52.585,122.323 53.085,122.322
  region net 3V3: 52.554,116.616 52.097,116.616 52.075,116.403 52.575,116.402
  region net 3V3: 52.63,116.836 52.305,116.513 52.441,116.347 52.795,116.7
  region net 3V3: 52.533,117.041 52.078,116.996 52.034,117.206 52.534,117.255
  region net GPIO0: 79.127,112.386 79.127,111.929 79.34,112.007 79.34,112.307
  region net GPIO0: 61.02,105.456 60.696,105.134 60.902,105.038 61.114,105.25
  region net RXD: 56.684,110.779 56.684,111.236 56.47,111.158 56.47,110.858
  region net 3V3: 59.584,97.716 59.127,97.716 59.206,97.502 59.506,97.503
  region net 3V3: 59.58,98.123 59.123,98.115 59.198,98.33 59.498,98.335
  region net H3_2: 78.958,61.656 78.958,62.799 79.492,62.377 79.492,62.077
  region net H3_4: 71.02,59.002 69.67,59.003 70.194,58.372 70.494,58.372
  region net H3_4: 86.726,44.081 87.627,43.179 86.862,43.103 86.65,43.316
  region net H3_2: 82.441,44.876 83.343,43.974 83.419,44.74 83.206,44.952
  region net H3_1: 79.106,43.973 80.006,44.876 79.241,44.951 79.029,44.738
  region net SCL: 52.35,105.059 53.254,105.959 53.328,105.194 53.116,104.982
  region net IO16: 58.722,106.5 57.524,106.812 58.119,107.254 58.419,107.176
  region net H1_4: 53.106,89.526 52.798,90.763 53.492,90.438 53.567,90.138
  pour cut-out net Q1_2: 84.055,119.528 84.205,119.318 86.285,116.998 86.285,115.118 86.315,115.088 86.365,115.088 86.815,114.768 86.965,114.668 87.915,114.338 85.305,114.278 85.855,114.838 85.865,116.868 85.855,116.878 85.755,116.968 84.815,117.818 84.015,117.818 83.955,117.878
  pour cut-out net SDA: 62.538,95.028 62.638,95.128 78.638,95.128 78.638,87.828 62.538,87.828
Bottom Layer:
  region net BEEP: 60.238,96.776 60.236,96.318 60.45,96.396 60.451,96.696
  region net BEEP: 65.564,100.766 65.107,100.766 65.186,100.553 65.486,100.553
  region net 3V3: 54.624,110.409 54.167,110.409 54.245,110.623 54.545,110.623
  region net 3V3: 54.624,110.006 54.167,110.006 54.146,109.792 54.646,109.793
  region net Q1_1: 77.948,125.403 77.859,124.954 78.063,124.887 78.162,125.387
  region net Q1_1: 80.617,107.026 81.074,107.026 81.095,106.812 80.595,106.812
  region net Q1_1: 81.074,107.43 80.616,107.429 80.595,107.643 81.095,107.643
  region net Q1_1: 81.079,99.385 80.622,99.374 80.595,99.587 81.095,99.599
  region net ADC: 77.375,98.347 76.917,98.345 76.997,98.132 77.297,98.133
  region net IO16: 75.464,102.358 75.463,102.816 75.25,102.737 75.251,102.437
  region net DM: 71.004,122.698 71.003,123.156 70.79,123.077 70.79,122.777
  region net DM: 71.434,122.726 70.977,122.726 71.079,122.512 71.333,122.512
  region net DM: 70.596,121.239 70.465,121.591 70.646,121.607 70.743,121.345
  region net VBUS: 68.486,118.403 68.486,119.153 68.836,119.278 68.836,118.278
  region net RXD: 60.864,97.812 60.541,97.488 60.445,97.694 60.657,97.907
  region net RXD: 55.424,110.716 54.967,110.716 55.046,110.502 55.346,110.503
  region net TXD: 60.75,98.983 60.542,98.576 60.384,98.737 60.528,99.017
  region net TXD: 55.697,111.486 56.154,111.486 56.075,111.273 55.775,111.273
  region net TXD: 56.154,111.889 55.697,111.889 55.775,112.103 56.075,112.103
  region net CC1: 62.527,123.329 62.527,123.786 62.74,123.708 62.74,123.408
  region net CC1: 71.674,123.629 71.674,124.086 71.46,124.008 71.46,123.708
  region net CC2: 62.537,122.389 62.537,122.846 62.75,122.767 62.75,122.467
  region net CC2: 68.654,122.399 68.654,122.856 68.44,122.778 68.44,122.478
  region net DP: 70.244,121.919 70.243,122.376 70.133,122.297 70.134,121.997
  region net DP: 60.66,111.589 60.336,111.912 60.542,112.008 60.754,111.796
  region net DM: 60.66,112.689 60.336,113.012 60.542,113.108 60.754,112.896
  region net 3V3: 74.404,110.279 74.404,110.736 74.19,110.758 74.19,110.258
  region net 3V3: 65.869,113.927 65.546,113.603 65.682,113.437 66.035,113.791
  region net VBUS: 69.44,118.403 69.44,119.153 69.09,119.278 69.09,118.278
  region net VBUS: 70.102,118.403 70.102,119.153 70.452,119.278 70.452,118.278
  region net VBUS: 71.104,118.403 71.104,119.153 70.754,119.278 70.754,118.278
  region net LED1_1: 83.007,93.159 83.007,93.616 83.22,93.638 83.22,93.138
  region net 3V3: 52.854,121.603 52.531,121.927 52.365,121.791 52.719,121.437
  region net 3V3: 52.097,117.019 52.554,117.019 52.575,117.233 52.075,117.233
  region net GPIO0: 79.154,111.955 78.696,111.956 78.775,111.743 79.075,111.742
  region net GPIO0: 60.918,105.666 60.916,105.208 61.13,105.286 61.131,105.586
  region net RXD: 57.189,110.988 56.866,111.312 57.073,111.407 57.285,111.195
  region net 3V3: 59.374,98.222 59.051,97.898 58.956,98.105 59.168,98.317
  region net LED1_1: 88.205,94.695 89.013,93.887 88.408,93.737 88.055,94.091
  region net 3V3: 52.967,102.73 52.967,104.005 53.562,103.518 53.562,103.218
  region net 3V3: 53.24,103.529 52.141,104.176 52.77,104.496 53.215,104.234
  region net IO16: 57.933,105.304 58.809,106.179 58.886,105.439 58.674,105.226
  region net ADC: 52.352,94.24 53.255,95.141 53.33,94.375 53.117,94.163
  region net 3V3: 52.288,113.249 53.084,114.044 53.163,113.382 52.951,113.169
  region net TXD: 54.828,113.249 55.624,114.044 55.703,113.382 55.491,113.169
  region net RXD: 57.978,113.501 56.853,113.501 57.265,112.976 57.565,112.976
  pour cut-out net SDA: 62.488,94.978 62.588,95.078 78.588,95.078 78.588,87.778 62.488,87.778

## Silkscreen, mask and mechanical layers (free items; w line width, h text height)
Top Overlay:
  circle w0.2: c88.375,99.458 r0.2
  lines w0.1 net S$20504: 65.485,126.858 65.485,127.828
  lines w0.1 net S$20506: 65.475,124.918 65.475,126.148
  lines w0.1 net S$20508: 65.485,122.668 65.485,123.868
  lines w0.1 net S$20510: 64.595,121.308 65.485,121.308 65.485,121.808
  lines w0.1 net S$20512: 62.145,121.298 63.705,121.298
  lines w0.1 net S$20514: 59.225,121.298 60.975,121.298
  lines w0.1 net S$20516: 56.115,121.308 57.875,121.318
  lines w0.1 net S$20520: 53.085,121.308 54.815,121.298
  lines w0.1 net S$20522: 50.595,121.318 51.775,121.318
  lines w0.1 net S$35757: 50.825,115.718 52.425,115.718 ; 50.835,110.078 52.435,110.078 ; 55.135,110.038 56.735,110.038 ; 58.192,115.678 59.792,115.678 ; 58.915,110.058 60.515,110.058 ; 60.585,111.558 60.585,113.158 ; 60.586,114.078 60.586,115.678
  lines w0.1 net S$35779: 60.515,110.058 60.625,110.168 60.625,110.688
  lines w0.1 net S$35781: 60.295,115.668 60.576,115.668 60.586,115.678
  lines w0.254: 50.605,86.227 90.605,86.227 ; 50.605,87.828 90.605,87.828
  text "—" at 75.115,119.018 h1.5 r90
  text "DC" at 75.035,116.848 h1.5
  text "+24V" at 74.265,114.208 h1.5
  text "heater" at 84.175,112.388 h1.5 r359
  text "+" at 82.345,112.238 h2 r223
  text "-" at 88.735,112.248 h2 r90
  text "SDA" at 55.295,107.448 h0.8 r90
  text "K" at 85.835,105.058 h1.5 r180
  text "SCL" at 55.255,104.998 h0.8 r90
  text "+" at 88.815,104.798 h2 r137
  text "-" at 83.025,104.778 h2 r90
  text "3V3" at 55.305,102.258 h0.8 r90
  text "G" at 54.455,100.538 h0.8 r270
  text "LED+" at 87.665,95.628 h1.2
  text "LED-" at 87.635,89.998 h1.2
  text "DL" at 58.485,88.438 h1.2
  text "RST" at 81.665,88.398 h1.2
Bottom Overlay:
  lines w0.2 net S$3262: 67.741,112.838 68.241,112.838
  lines w0.254: 50.605,86.227 90.605,86.227 ; 50.605,87.828 90.605,87.828 ; 50.805,99.268 56.735,99.268 56.735,110.377 50.805,110.377 50.805,99.268 ; 50.885,111.722 61.335,111.722 61.335,117.347 50.885,117.347 50.885,111.722
  text "TTL烧录" at 59.326,115.388 h2
  text "-" at 87.835,114.217 h1.5 r90
  text "+" at 84.915,114.068 h1.5 r43
  text "3V3" at 53.295,111.968 h1.5
  text "TXD" at 58.405,111.968 h1.5
  text "G" at 60.155,111.938 h1.5 r358
  text "RXD" at 55.895,111.788 h1.5
  text "chuan" at 72.435,111.208 h2.5
  text "+" at 87.125,109.738 h1.5 r223
  text "-" at 84.715,109.578 h1.5 r270
  text "OLED" at 54.426,102.798 h2 r270
  text "MINI加热台V4.0" at 78.101,98.223 h2.03
  text "2021-6-27" at 73.405,95.428 h1.5
Top Paste:
  rectangle net GND: 76.985,120.298 79.485,122.038
Top Solder:
  rectangle net GND: 76.985,120.288 79.485,122.027
Document:
  lines w0.3 net S$29675: 96.835,43.978 101.385,43.978
  lines w0.3 net S$29677: 96.835,43.978 96.905,43.978 97.715,44.788
  lines w0.3 net S$29679: 96.835,43.978 96.835,43.768 97.575,43.028
  lines w0.3 net S$29681: 39.665,92.158 47.845,92.158 47.565,92.158 46.765,92.958
  lines w0.3 net S$29683: 46.855,91.218 47.516,91.878 47.516,92.158
  text "孔1.2mm" at 38.135,93.738 h2.03 r1
  text "3脚接地" at 101.365,60.898 h2.03
  text "0.55孔" at 102.185,43.578 h2.03 r2
  text "针不露出底" at 109.095,43.527 h2.03

## Text inside footprints (layer, text, board x,y; h text height)
U4: Top Overlay "ESP12F" at 66.105,102.812 h2.03
U10: Top Overlay "B103" at 83.443,65.783 h2.03 r270